# EAGLE board SparkFun_MOSFET_Power_Controller_Panel_v10 (EAGLE 7.5.0)
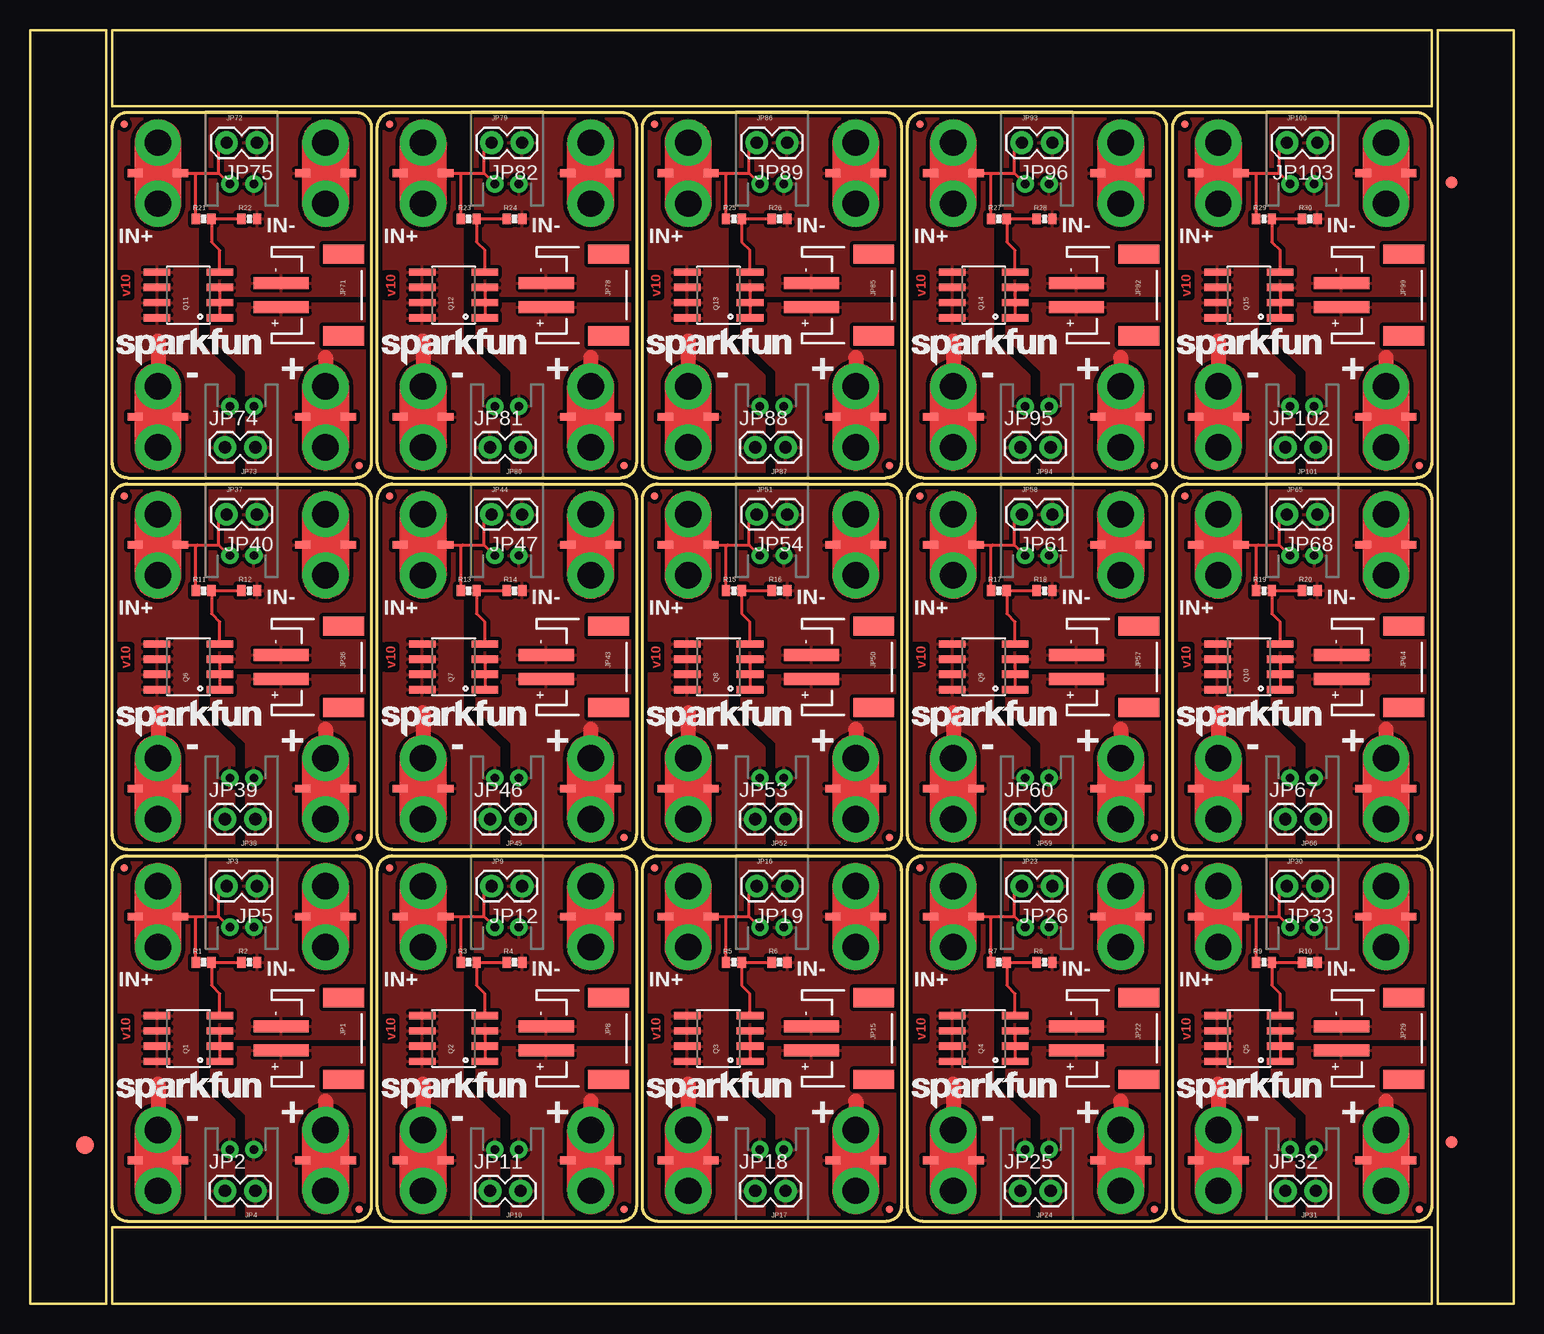
[diagram p0: board, top side]
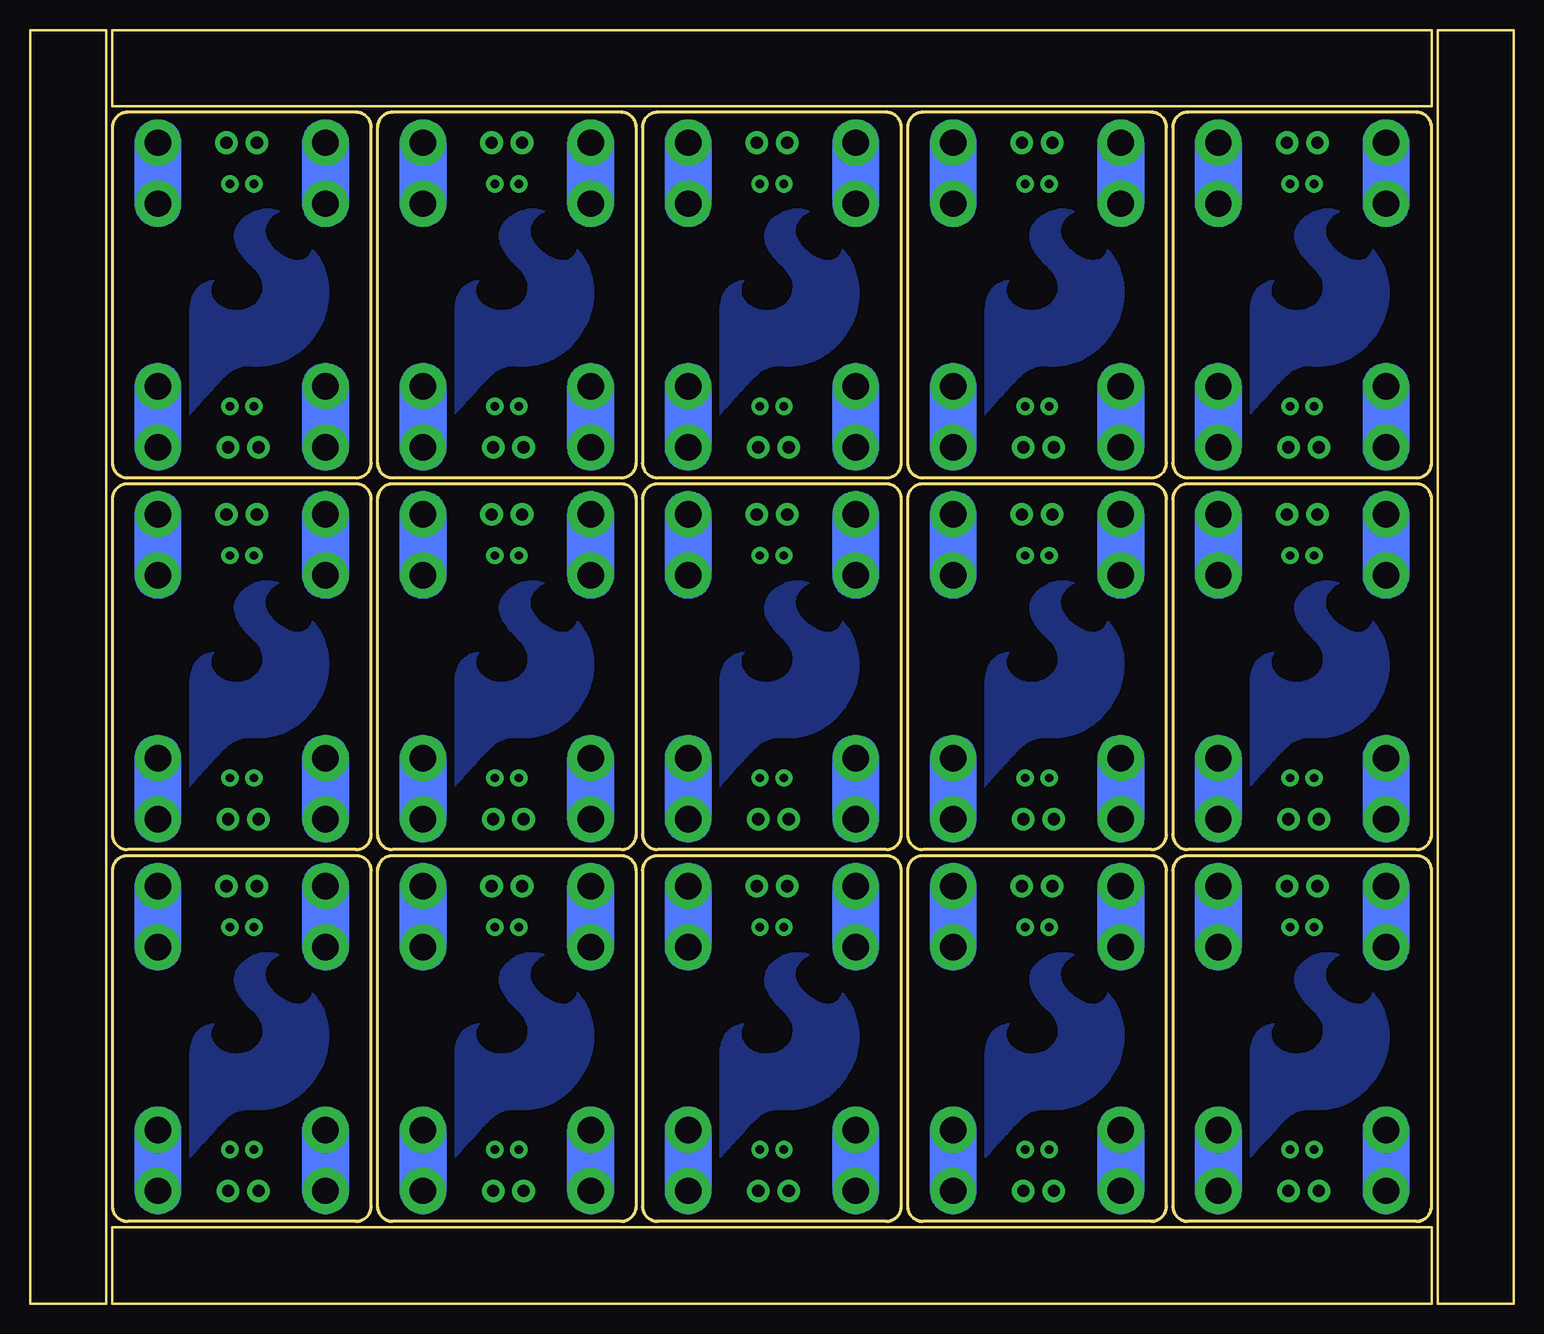
[diagram p1: board, bottom side, seen from below]

Size 123.7 x 106.17 mm. Coordinates in mm from the lower left corner, seen from the top.
Outline: 6.35,79.25 6.35,0 0,0 0,29.72
Outline: 0,27.18 0,106.17 6.35,106.17 6.35,76.71
Outline: 79.25,0 6.86,0 6.86,6.35 29.72,6.35
Outline: 27.18,6.35 116.84,6.35 116.84,0 76.71,0
Outline: 123.7,79.25 123.7,0 117.35,0 117.35,29.72
Outline: 117.35,27.18 117.35,106.17 123.7,106.17 123.7,76.71
Outline: 44.45,106.17 116.84,106.17 116.84,99.82 93.98,99.82
Outline: 96.52,99.82 6.86,99.82 6.86,106.17 46.99,106.17
Outline: 8.13,6.86 27.18,6.86 arc90 28.45,8.13 28.45,36.07 arc90 27.18,37.34 8.13,37.34 arc90 6.86,36.07 6.86,8.13 arc90 8.13,6.86
Outline: 30.23,6.86 49.28,6.86 arc90 50.55,8.13 50.55,36.07 arc90 49.28,37.34 30.23,37.34 arc90 28.96,36.07 28.96,8.13 arc90 30.23,6.86
Outline: 52.32,6.86 71.37,6.86 arc90 72.64,8.13 72.64,36.07 arc90 71.37,37.34 52.32,37.34 arc90 51.05,36.07 51.05,8.13 arc90 52.32,6.86
Outline: 74.42,6.86 93.47,6.86 arc90 94.74,8.13 94.74,36.07 arc90 93.47,37.34 74.42,37.34 arc90 73.15,36.07 73.15,8.13 arc90 74.42,6.86
Outline: 96.52,6.86 115.57,6.86 arc90 116.84,8.13 116.84,36.07 arc90 115.57,37.34 96.52,37.34 arc90 95.25,36.07 95.25,8.13 arc90 96.52,6.86
Outline: 8.13,37.85 27.18,37.85 arc90 28.45,39.12 28.45,67.06 arc90 27.18,68.33 8.13,68.33 arc90 6.86,67.06 6.86,39.12 arc90 8.13,37.85
Outline: 30.23,37.85 49.28,37.85 arc90 50.55,39.12 50.55,67.06 arc90 49.28,68.33 30.23,68.33 arc90 28.96,67.06 28.96,39.12 arc90 30.23,37.85
Outline: 52.32,37.85 71.37,37.85 arc90 72.64,39.12 72.64,67.06 arc90 71.37,68.33 52.32,68.33 arc90 51.05,67.06 51.05,39.12 arc90 52.32,37.85
Outline: 74.42,37.85 93.47,37.85 arc90 94.74,39.12 94.74,67.06 arc90 93.47,68.33 74.42,68.33 arc90 73.15,67.06 73.15,39.12 arc90 74.42,37.85
Outline: 96.52,37.85 115.57,37.85 arc90 116.84,39.12 116.84,67.06 arc90 115.57,68.33 96.52,68.33 arc90 95.25,67.06 95.25,39.12 arc90 96.52,37.85
Outline: 8.13,68.83 27.18,68.83 arc90 28.45,70.1 28.45,98.04 arc90 27.18,99.31 8.13,99.31 arc90 6.86,98.04 6.86,70.1 arc90 8.13,68.83
Outline: 30.23,68.83 49.28,68.83 arc90 50.55,70.1 50.55,98.04 arc90 49.28,99.31 30.23,99.31 arc90 28.96,98.04 28.96,70.1 arc90 30.23,68.83
Outline: 52.32,68.83 71.37,68.83 arc90 72.64,70.1 72.64,98.04 arc90 71.37,99.31 52.32,99.31 arc90 51.05,98.04 51.05,70.1 arc90 52.32,68.83
Outline: 74.42,68.83 93.47,68.83 arc90 94.74,70.1 94.74,98.04 arc90 93.47,99.31 74.42,99.31 arc90 73.15,98.04 73.15,70.1 arc90 74.42,68.83
Outline: 96.52,68.83 115.57,68.83 arc90 116.84,70.1 116.84,98.04 arc90 115.57,99.31 96.52,99.31 arc90 95.25,98.04 95.25,70.1 arc90 96.52,68.83
Copper layers (1*16): Top 0.035mm / dielectric 1.5mm / Bottom 0.035mm
Design rules "default": minimum track width 8mil, minimum drill 20mil, track to track 8mil, track to pad 8mil, pad to pad 8mil, via to via 8mil, smd to smd 8mil, copper to edge 8mil, drill to drill 8mil, minimum pad ring 12mil, minimum via ring 10mil, stop-mask expansion 4mil, vias tented up to drill 20mil, thermal gap 10mil
bRestrict: area 6.9,6.7 to 23.4,37.2; area 11.9,6.7 to 28.4,37.2; area 29,6.7 to 45.5,37.2; area 34,6.7 to 50.5,37.2; area 51.1,6.7 to 67.6,37.2; area 56.1,6.7 to 72.6,37.2; area 73.2,6.7 to 89.7,37.2; area 78.2,6.7 to 94.7,37.2; area 95.2,6.7 to 111.8,37.2; area 100.3,6.7 to 116.8,37.2; area 6.9,37.7 to 23.4,68.2; area 11.9,37.7 to 28.4,68.2; area 29,37.7 to 45.5,68.2; area 34,37.7 to 50.5,68.2; area 51.1,37.7 to 67.6,68.2; area 56.1,37.7 to 72.6,68.2; area 73.2,37.7 to 89.7,68.2; area 78.2,37.7 to 94.7,68.2; area 95.2,37.7 to 111.8,68.2; area 100.3,37.7 to 116.8,68.2; area 6.9,68.7 to 23.4,99.2; area 11.9,68.7 to 28.4,99.2; area 29,68.7 to 45.5,99.2; area 34,68.7 to 50.5,99.2; area 51.1,68.7 to 67.6,99.2; area 56.1,68.7 to 72.6,99.2; area 73.2,68.7 to 89.7,99.2; area 78.2,68.7 to 94.7,99.2; area 95.2,68.7 to 111.8,99.2; area 100.3,68.7 to 116.8,99.2

## Footprints (pad centres in the part's own frame; a part is rotated, then mirrored left to right if it is on the bottom)
BUTTONHOLE = drill 2.2 pad 3.81: 1 0,0; P$2 5.08,0 | smd 0.635 x 1.27: P$1 2.54,1.905; P$3 2.54,-1.905
FIDUCIAL-1.5X3 = smd 1.5 x 1.5: 1 0,0
FIDUCIAL-1X2 = smd 1 x 1: 1 0,0
JST-2-SMD = smd 1 x 4.6: 1 -1,-3.7; 2 1,-3.7 | smd 1.6 x 3.4: NC1 -3.4,1.5; NC2 3.4,1.5
1X02 = drill 1.016 pad 1.88: 1 0,0; 2 2.54,0
JST-2-PTH-NS = drill 0.7 pad 1.448: 1 -1,0; 2 1,0
MICRO-FIDUCIAL = smd 0.635 x 0.635: 1 0,0
SO08 = smd 0.61 x 2.21: 1 -1.905,-2.616; 2 -0.635,-2.616; 3 0.635,-2.616; 4 1.905,-2.616; 5 1.905,2.616; 6 0.635,2.616; 7 -0.635,2.616; 8 -1.905,2.616
0402-RES = smd 0.7 x 0.9: 1 -0.65,0; 2 0.65,0

## Placement (x,y rotation side)
BH1  TRIG+  [BUTTONHOLE]  10.67,34.8 270 top
BH2  TRIG-  [BUTTONHOLE]  24.64,29.72 90 top
BH3  OUT+  [BUTTONHOLE]  24.64,9.4 90 top
BH4  OUT-  [BUTTONHOLE]  10.67,14.48 270 top
BH5  TRIG+  [BUTTONHOLE]  32.77,34.8 270 top
BH6  TRIG-  [BUTTONHOLE]  46.74,29.72 90 top
BH7  OUT+  [BUTTONHOLE]  46.74,9.4 90 top
BH8  OUT-  [BUTTONHOLE]  32.77,14.48 270 top
BH9  TRIG+  [BUTTONHOLE]  54.86,34.8 270 top
BH10  TRIG-  [BUTTONHOLE]  68.83,29.72 90 top
BH11  OUT+  [BUTTONHOLE]  68.83,9.4 90 top
BH12  OUT-  [BUTTONHOLE]  54.86,14.48 270 top
BH13  TRIG+  [BUTTONHOLE]  76.96,34.8 270 top
BH14  TRIG-  [BUTTONHOLE]  90.93,29.72 90 top
BH15  OUT+  [BUTTONHOLE]  90.93,9.4 90 top
BH16  OUT-  [BUTTONHOLE]  76.96,14.48 270 top
BH17  TRIG+  [BUTTONHOLE]  99.06,34.8 270 top
BH18  TRIG-  [BUTTONHOLE]  113.03,29.72 90 top
BH19  OUT+  [BUTTONHOLE]  113.03,9.4 90 top
BH20  OUT-  [BUTTONHOLE]  99.06,14.48 270 top
BH21  TRIG+  [BUTTONHOLE]  10.67,65.79 270 top
BH22  TRIG-  [BUTTONHOLE]  24.64,60.71 90 top
BH23  OUT+  [BUTTONHOLE]  24.64,40.39 90 top
BH24  OUT-  [BUTTONHOLE]  10.67,45.47 270 top
BH25  TRIG+  [BUTTONHOLE]  32.77,65.79 270 top
BH26  TRIG-  [BUTTONHOLE]  46.74,60.71 90 top
BH27  OUT+  [BUTTONHOLE]  46.74,40.39 90 top
BH28  OUT-  [BUTTONHOLE]  32.77,45.47 270 top
BH29  TRIG+  [BUTTONHOLE]  54.86,65.79 270 top
BH30  TRIG-  [BUTTONHOLE]  68.83,60.71 90 top
BH31  OUT+  [BUTTONHOLE]  68.83,40.39 90 top
BH32  OUT-  [BUTTONHOLE]  54.86,45.47 270 top
BH33  TRIG+  [BUTTONHOLE]  76.96,65.79 270 top
BH34  TRIG-  [BUTTONHOLE]  90.93,60.71 90 top
BH35  OUT+  [BUTTONHOLE]  90.93,40.39 90 top
BH36  OUT-  [BUTTONHOLE]  76.96,45.47 270 top
BH37  TRIG+  [BUTTONHOLE]  99.06,65.79 270 top
BH38  TRIG-  [BUTTONHOLE]  113.03,60.71 90 top
BH39  OUT+  [BUTTONHOLE]  113.03,40.39 90 top
BH40  OUT-  [BUTTONHOLE]  99.06,45.47 270 top
BH41  TRIG+  [BUTTONHOLE]  10.67,96.77 270 top
BH42  TRIG-  [BUTTONHOLE]  24.64,91.69 90 top
BH43  OUT+  [BUTTONHOLE]  24.64,71.37 90 top
BH44  OUT-  [BUTTONHOLE]  10.67,76.45 270 top
BH45  TRIG+  [BUTTONHOLE]  32.77,96.77 270 top
BH46  TRIG-  [BUTTONHOLE]  46.74,91.69 90 top
BH47  OUT+  [BUTTONHOLE]  46.74,71.37 90 top
BH48  OUT-  [BUTTONHOLE]  32.77,76.45 270 top
BH49  TRIG+  [BUTTONHOLE]  54.86,96.77 270 top
BH50  TRIG-  [BUTTONHOLE]  68.83,91.69 90 top
BH51  OUT+  [BUTTONHOLE]  68.83,71.37 90 top
BH52  OUT-  [BUTTONHOLE]  54.86,76.45 270 top
BH53  TRIG+  [BUTTONHOLE]  76.96,96.77 270 top
BH54  TRIG-  [BUTTONHOLE]  90.93,91.69 90 top
BH55  OUT+  [BUTTONHOLE]  90.93,71.37 90 top
BH56  OUT-  [BUTTONHOLE]  76.96,76.45 270 top
BH57  TRIG+  [BUTTONHOLE]  99.06,96.77 270 top
BH58  TRIG-  [BUTTONHOLE]  113.03,91.69 90 top
BH59  OUT+  [BUTTONHOLE]  113.03,71.37 90 top
BH60  OUT-  [BUTTONHOLE]  99.06,76.45 270 top
E$1  [FIDUCIAL-1.5X3]  4.57,13.21 0 top
E$5  [FIDUCIAL-1X2]  118.49,13.46 0 top
E$6  [FIDUCIAL-1X2]  118.49,93.47 180 top
JP1  JST-SMT  [JST-2-SMD]  24.64,22.1 270 top
JP2  [1X02]  16.26,9.4 0 top
JP3  JST-PTH  [JST-2-PTH-NS]  17.65,31.37 0 top
JP4  JST-PTH  [JST-2-PTH-NS]  17.65,12.83 180 top
JP5  [1X02]  18.92,34.8 180 top
JP6  FIDUCIALUFIDUCIAL  [MICRO-FIDUCIAL]  27.43,7.87 0 top
JP7  FIDUCIALUFIDUCIAL  [MICRO-FIDUCIAL]  7.87,36.32 0 top
JP8  JST-SMT  [JST-2-SMD]  46.74,22.1 270 top
JP9  JST-PTH  [JST-2-PTH-NS]  39.75,31.37 0 top
JP10  JST-PTH  [JST-2-PTH-NS]  39.75,12.83 180 top
JP11  [1X02]  38.35,9.4 0 top
JP12  [1X02]  41.02,34.8 180 top
JP13  FIDUCIALUFIDUCIAL  [MICRO-FIDUCIAL]  49.53,7.87 0 top
JP14  FIDUCIALUFIDUCIAL  [MICRO-FIDUCIAL]  29.97,36.32 0 top
JP15  JST-SMT  [JST-2-SMD]  68.83,22.1 270 top
JP16  JST-PTH  [JST-2-PTH-NS]  61.85,31.37 0 top
JP17  JST-PTH  [JST-2-PTH-NS]  61.85,12.83 180 top
JP18  [1X02]  60.45,9.4 0 top
JP19  [1X02]  63.12,34.8 180 top
JP20  FIDUCIALUFIDUCIAL  [MICRO-FIDUCIAL]  71.63,7.87 0 top
JP21  FIDUCIALUFIDUCIAL  [MICRO-FIDUCIAL]  52.07,36.32 0 top
JP22  JST-SMT  [JST-2-SMD]  90.93,22.1 270 top
JP23  JST-PTH  [JST-2-PTH-NS]  83.95,31.37 0 top
JP24  JST-PTH  [JST-2-PTH-NS]  83.95,12.83 180 top
JP25  [1X02]  82.55,9.4 0 top
JP26  [1X02]  85.22,34.8 180 top
JP27  FIDUCIALUFIDUCIAL  [MICRO-FIDUCIAL]  93.73,7.87 0 top
JP28  FIDUCIALUFIDUCIAL  [MICRO-FIDUCIAL]  74.17,36.32 0 top
JP29  JST-SMT  [JST-2-SMD]  113.03,22.1 270 top
JP30  JST-PTH  [JST-2-PTH-NS]  106.05,31.37 0 top
JP31  JST-PTH  [JST-2-PTH-NS]  106.05,12.83 180 top
JP32  [1X02]  104.65,9.4 0 top
JP33  [1X02]  107.31,34.8 180 top
JP34  FIDUCIALUFIDUCIAL  [MICRO-FIDUCIAL]  115.82,7.87 0 top
JP35  FIDUCIALUFIDUCIAL  [MICRO-FIDUCIAL]  96.27,36.32 0 top
JP36  JST-SMT  [JST-2-SMD]  24.64,53.09 270 top
JP37  JST-PTH  [JST-2-PTH-NS]  17.65,62.36 0 top
JP38  JST-PTH  [JST-2-PTH-NS]  17.65,43.81 180 top
JP39  [1X02]  16.26,40.39 0 top
JP40  [1X02]  18.92,65.79 180 top
JP41  FIDUCIALUFIDUCIAL  [MICRO-FIDUCIAL]  27.43,38.86 0 top
JP42  FIDUCIALUFIDUCIAL  [MICRO-FIDUCIAL]  7.87,67.31 0 top
JP43  JST-SMT  [JST-2-SMD]  46.74,53.09 270 top
JP44  JST-PTH  [JST-2-PTH-NS]  39.75,62.36 0 top
JP45  JST-PTH  [JST-2-PTH-NS]  39.75,43.81 180 top
JP46  [1X02]  38.35,40.39 0 top
JP47  [1X02]  41.02,65.79 180 top
JP48  FIDUCIALUFIDUCIAL  [MICRO-FIDUCIAL]  49.53,38.86 0 top
JP49  FIDUCIALUFIDUCIAL  [MICRO-FIDUCIAL]  29.97,67.31 0 top
JP50  JST-SMT  [JST-2-SMD]  68.83,53.09 270 top
JP51  JST-PTH  [JST-2-PTH-NS]  61.85,62.36 0 top
JP52  JST-PTH  [JST-2-PTH-NS]  61.85,43.81 180 top
JP53  [1X02]  60.45,40.39 0 top
JP54  [1X02]  63.12,65.79 180 top
JP55  FIDUCIALUFIDUCIAL  [MICRO-FIDUCIAL]  71.63,38.86 0 top
JP56  FIDUCIALUFIDUCIAL  [MICRO-FIDUCIAL]  52.07,67.31 0 top
JP57  JST-SMT  [JST-2-SMD]  90.93,53.09 270 top
JP58  JST-PTH  [JST-2-PTH-NS]  83.95,62.36 0 top
JP59  JST-PTH  [JST-2-PTH-NS]  83.95,43.81 180 top
JP60  [1X02]  82.55,40.39 0 top
JP61  [1X02]  85.22,65.79 180 top
JP62  FIDUCIALUFIDUCIAL  [MICRO-FIDUCIAL]  93.73,38.86 0 top
JP63  FIDUCIALUFIDUCIAL  [MICRO-FIDUCIAL]  74.17,67.31 0 top
JP64  JST-SMT  [JST-2-SMD]  113.03,53.09 270 top
JP65  JST-PTH  [JST-2-PTH-NS]  106.05,62.36 0 top
JP66  JST-PTH  [JST-2-PTH-NS]  106.05,43.81 180 top
JP67  [1X02]  104.65,40.39 0 top
JP68  [1X02]  107.31,65.79 180 top
JP69  FIDUCIALUFIDUCIAL  [MICRO-FIDUCIAL]  115.82,38.86 0 top
JP70  FIDUCIALUFIDUCIAL  [MICRO-FIDUCIAL]  96.27,67.31 0 top
JP71  JST-SMT  [JST-2-SMD]  24.64,84.07 270 top
JP72  JST-PTH  [JST-2-PTH-NS]  17.65,93.34 0 top
JP73  JST-PTH  [JST-2-PTH-NS]  17.65,74.8 180 top
JP74  [1X02]  16.26,71.37 0 top
JP75  [1X02]  18.92,96.77 180 top
JP76  FIDUCIALUFIDUCIAL  [MICRO-FIDUCIAL]  27.43,69.85 0 top
JP77  FIDUCIALUFIDUCIAL  [MICRO-FIDUCIAL]  7.87,98.3 0 top
JP78  JST-SMT  [JST-2-SMD]  46.74,84.07 270 top
JP79  JST-PTH  [JST-2-PTH-NS]  39.75,93.34 0 top
JP80  JST-PTH  [JST-2-PTH-NS]  39.75,74.8 180 top
JP81  [1X02]  38.35,71.37 0 top
JP82  [1X02]  41.02,96.77 180 top
JP83  FIDUCIALUFIDUCIAL  [MICRO-FIDUCIAL]  49.53,69.85 0 top
JP84  FIDUCIALUFIDUCIAL  [MICRO-FIDUCIAL]  29.97,98.3 0 top
JP85  JST-SMT  [JST-2-SMD]  68.83,84.07 270 top
JP86  JST-PTH  [JST-2-PTH-NS]  61.85,93.34 0 top
JP87  JST-PTH  [JST-2-PTH-NS]  61.85,74.8 180 top
JP88  [1X02]  60.45,71.37 0 top
JP89  [1X02]  63.12,96.77 180 top
JP90  FIDUCIALUFIDUCIAL  [MICRO-FIDUCIAL]  71.63,69.85 0 top
JP91  FIDUCIALUFIDUCIAL  [MICRO-FIDUCIAL]  52.07,98.3 0 top
JP92  JST-SMT  [JST-2-SMD]  90.93,84.07 270 top
JP93  JST-PTH  [JST-2-PTH-NS]  83.95,93.34 0 top
JP94  JST-PTH  [JST-2-PTH-NS]  83.95,74.8 180 top
JP95  [1X02]  82.55,71.37 0 top
JP96  [1X02]  85.22,96.77 180 top
JP97  FIDUCIALUFIDUCIAL  [MICRO-FIDUCIAL]  93.73,69.85 0 top
JP98  FIDUCIALUFIDUCIAL  [MICRO-FIDUCIAL]  74.17,98.3 0 top
JP99  JST-SMT  [JST-2-SMD]  113.03,84.07 270 top
JP100  JST-PTH  [JST-2-PTH-NS]  106.05,93.34 0 top
JP101  JST-PTH  [JST-2-PTH-NS]  106.05,74.8 180 top
JP102  [1X02]  104.65,71.37 0 top
JP103  [1X02]  107.31,96.77 180 top
JP104  FIDUCIALUFIDUCIAL  [MICRO-FIDUCIAL]  115.82,69.85 0 top
JP105  FIDUCIALUFIDUCIAL  [MICRO-FIDUCIAL]  96.27,98.3 0 top
Q1  FDS6630A  [SO08]  13.21,22.1 90 top
Q2  FDS6630A  [SO08]  35.31,22.1 90 top
Q3  FDS6630A  [SO08]  57.4,22.1 90 top
Q4  FDS6630A  [SO08]  79.5,22.1 90 top
Q5  FDS6630A  [SO08]  101.6,22.1 90 top
Q6  FDS6630A  [SO08]  13.21,53.09 90 top
Q7  FDS6630A  [SO08]  35.31,53.09 90 top
Q8  FDS6630A  [SO08]  57.4,53.09 90 top
Q9  FDS6630A  [SO08]  79.5,53.09 90 top
Q10  FDS6630A  [SO08]  101.6,53.09 90 top
Q11  FDS6630A  [SO08]  13.21,84.07 90 top
Q12  FDS6630A  [SO08]  35.31,84.07 90 top
Q13  FDS6630A  [SO08]  57.4,84.07 90 top
Q14  FDS6630A  [SO08]  79.5,84.07 90 top
Q15  FDS6630A  [SO08]  101.6,84.07 90 top
R1  10k  [0402-RES]  14.48,28.45 0 top
R2  1M  [0402-RES]  18.29,28.45 0 top
R3  10k  [0402-RES]  36.58,28.45 0 top
R4  1M  [0402-RES]  40.39,28.45 0 top
R5  10k  [0402-RES]  58.67,28.45 0 top
R6  1M  [0402-RES]  62.48,28.45 0 top
R7  10k  [0402-RES]  80.77,28.45 0 top
R8  1M  [0402-RES]  84.58,28.45 0 top
R9  10k  [0402-RES]  102.87,28.45 0 top
R10  1M  [0402-RES]  106.68,28.45 0 top
R11  10k  [0402-RES]  14.48,59.44 0 top
R12  1M  [0402-RES]  18.29,59.44 0 top
R13  10k  [0402-RES]  36.58,59.44 0 top
R14  1M  [0402-RES]  40.39,59.44 0 top
R15  10k  [0402-RES]  58.67,59.44 0 top
R16  1M  [0402-RES]  62.48,59.44 0 top
R17  10k  [0402-RES]  80.77,59.44 0 top
R18  1M  [0402-RES]  84.58,59.44 0 top
R19  10k  [0402-RES]  102.87,59.44 0 top
R20  1M  [0402-RES]  106.68,59.44 0 top
R21  10k  [0402-RES]  14.48,90.42 0 top
R22  1M  [0402-RES]  18.29,90.42 0 top
R23  10k  [0402-RES]  36.58,90.42 0 top
R24  1M  [0402-RES]  40.39,90.42 0 top
R25  10k  [0402-RES]  58.67,90.42 0 top
R26  1M  [0402-RES]  62.48,90.42 0 top
R27  10k  [0402-RES]  80.77,90.42 0 top
R28  1M  [0402-RES]  84.58,90.42 0 top
R29  10k  [0402-RES]  102.87,90.42 0 top
R30  1M  [0402-RES]  106.68,90.42 0 top

## Library data of the parts
BH1-BH60 = LilyPad-Wearables; NO_PART: 1
E$1 = SparkFun-Retired
E$5 E$6 = SparkFun-Aesthetics
JP1 JP8 JP15 JP22 JP29 JP36 JP43 JP50 JP57 JP64 JP71 JP78 JP85 JP92 JP99 = SparkFun-Connectors; PROD_ID: CONN-08352
JP2 JP5 JP11 JP12 JP18 JP19 JP25 JP26 JP32 JP33 JP39 JP40 JP46 JP47 JP53 JP54 JP60 JP61 JP67 JP68 JP74 JP75 JP81 JP82 JP88 JP89 JP95 JP96 JP102 JP103 = SparkFun-Connectors
JP3 JP4 JP9 JP10 JP16 JP17 JP23 JP24 JP30 JP31 JP37 JP38 JP44 JP45 JP51 JP52 JP58 JP59 JP65 JP66 JP72 JP73 JP79 JP80 JP86 JP87 JP93 JP94 JP100 JP101 = SparkFun-Connectors; NO_PART: 1
JP6 JP7 JP13 JP14 JP20 JP21 JP27 JP28 JP34 JP35 JP41 JP42 JP48 JP49 JP55 JP56 JP62 JP63 JP69 JP70 JP76 JP77 JP83 JP84 JP90 JP91 JP97 JP98 JP104 JP105 = SparkFun
Q1-Q15 = SparkFun-DiscreteSemi; PROD_ID: IC-08089
R1 R3 R5 R7 R9 R11 R13 R15 R17 R19 R21 R23 R25 R27 R29 = SparkFun-Passives; PROD_ID: RES-00824
R2 R4 R6 R8 R10 R12 R14 R16 R18 R20 R22 R24 R26 R28 R30 = SparkFun-Resistors; PROD_ID: RES-07868

## Nets
GND: BH2.P$1 JP1.1 JP3.2 JP5.1 Q1.1 Q1.2 Q1.3 R2.2
GND1: BH6.P$1 JP8.1 JP9.2 JP12.1 Q2.1 Q2.2 Q2.3 R4.2
GND2: BH10.P$1 JP15.1 JP16.2 JP19.1 Q3.1 Q3.2 Q3.3 R6.2
GND3: BH14.P$1 JP22.1 JP23.2 JP26.1 Q4.1 Q4.2 Q4.3 R8.2
GND4: BH18.P$1 JP29.1 JP30.2 JP33.1 Q5.1 Q5.2 Q5.3 R10.2
GND5: BH22.P$1 JP36.1 JP37.2 JP40.1 Q6.1 Q6.2 Q6.3 R12.2
GND6: BH26.P$1 JP43.1 JP44.2 JP47.1 Q7.1 Q7.2 Q7.3 R14.2
GND7: BH30.P$1 JP50.1 JP51.2 JP54.1 Q8.1 Q8.2 Q8.3 R16.2
GND8: BH34.P$1 JP57.1 JP58.2 JP61.1 Q9.1 Q9.2 Q9.3 R18.2
GND9: BH38.P$1 JP64.1 JP65.2 JP68.1 Q10.1 Q10.2 Q10.3 R20.2
GND10: BH42.P$1 JP71.1 JP72.2 JP75.1 Q11.1 Q11.2 Q11.3 R22.2
GND11: BH46.P$1 JP78.1 JP79.2 JP82.1 Q12.1 Q12.2 Q12.3 R24.2
GND12: BH50.P$1 JP85.1 JP86.2 JP89.1 Q13.1 Q13.2 Q13.3 R26.2
GND13: BH54.P$1 JP92.1 JP93.2 JP96.1 Q14.1 Q14.2 Q14.3 R28.2
GND14: BH58.P$1 JP99.1 JP100.2 JP103.1 Q15.1 Q15.2 Q15.3 R30.2
N$1: Q1.4 R1.2 R2.1
N$3: Q2.4 R3.2 R4.1
N$5: Q3.4 R5.2 R6.1
N$7: Q4.4 R7.2 R8.1
N$9: Q5.4 R9.2 R10.1
N$11: Q6.4 R11.2 R12.1
N$13: Q7.4 R13.2 R14.1
N$15: Q8.4 R15.2 R16.1
N$17: Q9.4 R17.2 R18.1
N$19: Q10.4 R19.2 R20.1
N$21: Q11.4 R21.2 R22.1
N$23: Q12.4 R23.2 R24.1
N$25: Q13.4 R25.2 R26.1
N$27: Q14.4 R27.2 R28.1
N$29: Q15.4 R29.2 R30.1
OUT-: BH4.P$1 JP2.1 JP4.2 Q1.5 Q1.6 Q1.7 Q1.8
OUT-1: BH8.P$1 JP10.2 JP11.1 Q2.5 Q2.6 Q2.7 Q2.8
OUT-2: BH12.P$1 JP17.2 JP18.1 Q3.5 Q3.6 Q3.7 Q3.8
OUT-3: BH16.P$1 JP24.2 JP25.1 Q4.5 Q4.6 Q4.7 Q4.8
OUT-4: BH20.P$1 JP31.2 JP32.1 Q5.5 Q5.6 Q5.7 Q5.8
OUT-5: BH24.P$1 JP38.2 JP39.1 Q6.5 Q6.6 Q6.7 Q6.8
OUT-6: BH28.P$1 JP45.2 JP46.1 Q7.5 Q7.6 Q7.7 Q7.8
OUT-7: BH32.P$1 JP52.2 JP53.1 Q8.5 Q8.6 Q8.7 Q8.8
OUT-8: BH36.P$1 JP59.2 JP60.1 Q9.5 Q9.6 Q9.7 Q9.8
OUT-9: BH40.P$1 JP66.2 JP67.1 Q10.5 Q10.6 Q10.7 Q10.8
OUT-10: BH44.P$1 JP73.2 JP74.1 Q11.5 Q11.6 Q11.7 Q11.8
OUT-11: BH48.P$1 JP80.2 JP81.1 Q12.5 Q12.6 Q12.7 Q12.8
OUT-12: BH52.P$1 JP87.2 JP88.1 Q13.5 Q13.6 Q13.7 Q13.8
OUT-13: BH56.P$1 JP94.2 JP95.1 Q14.5 Q14.6 Q14.7 Q14.8
OUT-14: BH60.P$1 JP101.2 JP102.1 Q15.5 Q15.6 Q15.7 Q15.8
TRIG+: BH1.P$1 JP3.1 JP5.2 R1.1
TRIG+1: BH5.P$1 JP9.1 JP12.2 R3.1
TRIG+2: BH9.P$1 JP16.1 JP19.2 R5.1
TRIG+3: BH13.P$1 JP23.1 JP26.2 R7.1
TRIG+4: BH17.P$1 JP30.1 JP33.2 R9.1
TRIG+5: BH21.P$1 JP37.1 JP40.2 R11.1
TRIG+6: BH25.P$1 JP44.1 JP47.2 R13.1
TRIG+7: BH29.P$1 JP51.1 JP54.2 R15.1
TRIG+8: BH33.P$1 JP58.1 JP61.2 R17.1
TRIG+9: BH37.P$1 JP65.1 JP68.2 R19.1
TRIG+10: BH41.P$1 JP72.1 JP75.2 R21.1
TRIG+11: BH45.P$1 JP79.1 JP82.2 R23.1
TRIG+12: BH49.P$1 JP86.1 JP89.2 R25.1
TRIG+13: BH53.P$1 JP93.1 JP96.2 R27.1
TRIG+14: BH57.P$1 JP100.1 JP103.2 R29.1
V_BATT: BH3.P$1 JP1.2 JP2.2 JP4.1
V_BATT1: BH7.P$1 JP8.2 JP10.1 JP11.2
V_BATT2: BH11.P$1 JP15.2 JP17.1 JP18.2
V_BATT3: BH15.P$1 JP22.2 JP24.1 JP25.2
V_BATT4: BH19.P$1 JP29.2 JP31.1 JP32.2
V_BATT5: BH23.P$1 JP36.2 JP38.1 JP39.2
V_BATT6: BH27.P$1 JP43.2 JP45.1 JP46.2
V_BATT7: BH31.P$1 JP50.2 JP52.1 JP53.2
V_BATT8: BH35.P$1 JP57.2 JP59.1 JP60.2
V_BATT9: BH39.P$1 JP64.2 JP66.1 JP67.2
V_BATT10: BH43.P$1 JP71.2 JP73.1 JP74.2
V_BATT11: BH47.P$1 JP78.2 JP80.1 JP81.2
V_BATT12: BH51.P$1 JP85.2 JP87.1 JP88.2
V_BATT13: BH55.P$1 JP92.2 JP94.1 JP95.2
V_BATT14: BH59.P$1 JP99.2 JP101.1 JP102.2

## Tracks (layer width: path | path; a pad name or v marks a point on that pad's centre or on a via)
GND
  Top 0.254: Q1.3 Q1.2 Q1.1
  pour Top (isolate 0.305): 14.99,37.34 14.99,22.1 28.45,22.1 28.45,37.34
GND1
  Top 0.254: Q2.3 Q2.2 Q2.1
  pour Top (isolate 0.305): 37.08,37.34 37.08,22.1 50.55,22.1 50.55,37.34
GND2
  Top 0.254: Q3.3 Q3.2 Q3.1
  pour Top (isolate 0.305): 59.18,37.34 59.18,22.1 72.64,22.1 72.64,37.34
GND3
  Top 0.254: Q4.3 Q4.2 Q4.1
  pour Top (isolate 0.305): 81.28,37.34 81.28,22.1 94.74,22.1 94.74,37.34
GND4
  Top 0.254: Q5.3 Q5.2 Q5.1
  pour Top (isolate 0.305): 103.38,37.34 103.38,22.1 116.84,22.1 116.84,37.34
GND5
  Top 0.254: Q6.3 Q6.2 Q6.1
  pour Top (isolate 0.305): 14.99,68.33 14.99,53.09 28.45,53.09 28.45,68.33
GND6
  Top 0.254: Q7.3 Q7.2 Q7.1
  pour Top (isolate 0.305): 37.08,68.33 37.08,53.09 50.55,53.09 50.55,68.33
GND7
  Top 0.254: Q8.3 Q8.2 Q8.1
  pour Top (isolate 0.305): 59.18,68.33 59.18,53.09 72.64,53.09 72.64,68.33
GND8
  Top 0.254: Q9.3 Q9.2 Q9.1
  pour Top (isolate 0.305): 81.28,68.33 81.28,53.09 94.74,53.09 94.74,68.33
GND9
  Top 0.254: Q10.3 Q10.2 Q10.1
  pour Top (isolate 0.305): 103.38,68.33 103.38,53.09 116.84,53.09 116.84,68.33
GND10
  Top 0.254: Q11.3 Q11.2 Q11.1
  pour Top (isolate 0.305): 14.99,99.31 14.99,84.07 28.45,84.07 28.45,99.31
GND11
  Top 0.254: Q12.3 Q12.2 Q12.1
  pour Top (isolate 0.305): 37.08,99.31 37.08,84.07 50.55,84.07 50.55,99.31
GND12
  Top 0.254: Q13.3 Q13.2 Q13.1
  pour Top (isolate 0.305): 59.18,99.31 59.18,84.07 72.64,84.07 72.64,99.31
GND13
  Top 0.254: Q14.3 Q14.2 Q14.1
  pour Top (isolate 0.305): 81.28,99.31 81.28,84.07 94.74,84.07 94.74,99.31
GND14
  Top 0.254: Q15.3 Q15.2 Q15.1
  pour Top (isolate 0.305): 103.38,99.31 103.38,84.07 116.84,84.07 116.84,99.31
N$1
  Top 0.254: R2.1 R1.2 15.13,26.53 15.82,25.83 Q1.4
N$2
  pour Bottom (isolate 0.305): 6.86,37.34 28.45,37.34 28.45,6.86 6.86,6.86
N$3
  Top 0.254: R4.1 R3.2 37.23,26.53 37.92,25.83 Q2.4
N$4
  pour Bottom (isolate 0.305): 28.96,37.34 50.55,37.34 50.55,6.86 28.96,6.86
N$5
  Top 0.254: R6.1 R5.2 59.32,26.53 60.02,25.83 Q3.4
N$6
  pour Bottom (isolate 0.305): 51.05,37.34 72.64,37.34 72.64,6.86 51.05,6.86
N$7
  Top 0.254: R8.1 R7.2 81.42,26.53 82.12,25.83 Q4.4
N$8
  pour Bottom (isolate 0.305): 73.15,37.34 94.74,37.34 94.74,6.86 73.15,6.86
N$9
  Top 0.254: R10.1 R9.2 103.52,26.53 104.22,25.83 Q5.4
N$10
  pour Bottom (isolate 0.305): 95.25,37.34 116.84,37.34 116.84,6.86 95.25,6.86
N$11
  Top 0.254: R12.1 R11.2 15.13,57.52 15.82,56.82 Q6.4
N$12
  pour Bottom (isolate 0.305): 6.86,68.33 28.45,68.33 28.45,37.85 6.86,37.85
N$13
  Top 0.254: R14.1 R13.2 37.23,57.52 37.92,56.82 Q7.4
N$14
  pour Bottom (isolate 0.305): 28.96,68.33 50.55,68.33 50.55,37.85 28.96,37.85
N$15
  Top 0.254: R16.1 R15.2 59.32,57.52 60.02,56.82 Q8.4
N$16
  pour Bottom (isolate 0.305): 51.05,68.33 72.64,68.33 72.64,37.85 51.05,37.85
N$17
  Top 0.254: R18.1 R17.2 81.42,57.52 82.12,56.82 Q9.4
N$18
  pour Bottom (isolate 0.305): 73.15,68.33 94.74,68.33 94.74,37.85 73.15,37.85
N$19
  Top 0.254: R20.1 R19.2 103.52,57.52 104.22,56.82 Q10.4
N$20
  pour Bottom (isolate 0.305): 95.25,68.33 116.84,68.33 116.84,37.85 95.25,37.85
N$21
  Top 0.254: R22.1 R21.2 15.13,88.5 15.82,87.81 Q11.4
N$22
  pour Bottom (isolate 0.305): 6.86,99.31 28.45,99.31 28.45,68.83 6.86,68.83
N$23
  Top 0.254: R24.1 R23.2 37.23,88.5 37.92,87.81 Q12.4
N$24
  pour Bottom (isolate 0.305): 28.96,99.31 50.55,99.31 50.55,68.83 28.96,68.83
N$25
  Top 0.254: R26.1 R25.2 59.32,88.5 60.02,87.81 Q13.4
N$26
  pour Bottom (isolate 0.305): 51.05,99.31 72.64,99.31 72.64,68.83 51.05,68.83
N$27
  Top 0.254: R28.1 R27.2 81.42,88.5 82.12,87.81 Q14.4
N$28
  pour Bottom (isolate 0.305): 73.15,99.31 94.74,99.31 94.74,68.83 73.15,68.83
N$29
  Top 0.254: R30.1 R29.2 103.52,88.5 104.22,87.81 Q15.4
N$30
  pour Bottom (isolate 0.305): 95.25,99.31 116.84,99.31 116.84,68.83 95.25,68.83
OUT-
  Top 1.27: 10.67,18.29 10.67,14.48
  pour Top (isolate 0.305): 13.97,18.29 13.97,37.34 6.86,37.34 6.86,6.86 17.02,6.86 17.02,15.37
OUT-1
  Top 1.27: 32.77,18.29 32.77,14.48
  pour Top (isolate 0.305): 36.07,18.29 36.07,37.34 28.96,37.34 28.96,6.86 39.12,6.86 39.12,15.37
OUT-2
  Top 1.27: 54.86,18.29 54.86,14.48
  pour Top (isolate 0.305): 58.17,18.29 58.17,37.34 51.05,37.34 51.05,6.86 61.21,6.86 61.21,15.37
OUT-3
  Top 1.27: 76.96,18.29 76.96,14.48
  pour Top (isolate 0.305): 80.26,18.29 80.26,37.34 73.15,37.34 73.15,6.86 83.31,6.86 83.31,15.37
OUT-4
  Top 1.27: 99.06,18.29 99.06,14.48
  pour Top (isolate 0.305): 102.36,18.29 102.36,37.34 95.25,37.34 95.25,6.86 105.41,6.86 105.41,15.37
OUT-5
  Top 1.27: 10.67,49.28 10.67,45.47
  pour Top (isolate 0.305): 13.97,49.28 13.97,68.33 6.86,68.33 6.86,37.85 17.02,37.85 17.02,46.35
OUT-6
  Top 1.27: 32.77,49.28 32.77,45.47
  pour Top (isolate 0.305): 36.07,49.28 36.07,68.33 28.96,68.33 28.96,37.85 39.12,37.85 39.12,46.35
OUT-7
  Top 1.27: 54.86,49.28 54.86,45.47
  pour Top (isolate 0.305): 58.17,49.28 58.17,68.33 51.05,68.33 51.05,37.85 61.21,37.85 61.21,46.35
OUT-8
  Top 1.27: 76.96,49.28 76.96,45.47
  pour Top (isolate 0.305): 80.26,49.28 80.26,68.33 73.15,68.33 73.15,37.85 83.31,37.85 83.31,46.35
OUT-9
  Top 1.27: 99.06,49.28 99.06,45.47
  pour Top (isolate 0.305): 102.36,49.28 102.36,68.33 95.25,68.33 95.25,37.85 105.41,37.85 105.41,46.35
OUT-10
  Top 1.27: 10.67,80.26 10.67,76.45
  pour Top (isolate 0.305): 13.97,80.26 13.97,99.31 6.86,99.31 6.86,68.83 17.02,68.83 17.02,77.34
OUT-11
  Top 1.27: 32.77,80.26 32.77,76.45
  pour Top (isolate 0.305): 36.07,80.26 36.07,99.31 28.96,99.31 28.96,68.83 39.12,68.83 39.12,77.34
OUT-12
  Top 1.27: 54.86,80.26 54.86,76.45
  pour Top (isolate 0.305): 58.17,80.26 58.17,99.31 51.05,99.31 51.05,68.83 61.21,68.83 61.21,77.34
OUT-13
  Top 1.27: 76.96,80.26 76.96,76.45
  pour Top (isolate 0.305): 80.26,80.26 80.26,99.31 73.15,99.31 73.15,68.83 83.31,68.83 83.31,77.34
OUT-14
  Top 1.27: 99.06,80.26 99.06,76.45
  pour Top (isolate 0.305): 102.36,80.26 102.36,99.31 95.25,99.31 95.25,68.83 105.41,68.83 105.41,77.34
TRIG+
  Top 0.254: 15.75,32.26 JP3.1 | BH1.P$1 13.97,32.26 | 13.97,32.26 15.75,32.26 | R1.1 13.83,32.12 13.97,32.26 | 15.75,32.26 15.75,34.16 JP5.2
TRIG+1
  Top 0.254: 37.85,32.26 JP9.1 | BH5.P$1 36.07,32.26 | 36.07,32.26 37.85,32.26 | R3.1 35.93,32.12 36.07,32.26 | 37.85,32.26 37.85,34.16 JP12.2
TRIG+2
  Top 0.254: 59.94,32.26 JP16.1 | BH9.P$1 58.17,32.26 | 58.17,32.26 59.94,32.26 | R5.1 58.02,32.12 58.17,32.26 | 59.94,32.26 59.94,34.16 JP19.2
TRIG+3
  Top 0.254: 82.04,32.26 JP23.1 | BH13.P$1 80.26,32.26 | 80.26,32.26 82.04,32.26 | R7.1 80.12,32.12 80.26,32.26 | 82.04,32.26 82.04,34.16 JP26.2
TRIG+4
  Top 0.254: 104.14,32.26 JP30.1 | BH17.P$1 102.36,32.26 | 102.36,32.26 104.14,32.26 | R9.1 102.22,32.12 102.36,32.26 | 104.14,32.26 104.14,34.16 JP33.2
TRIG+5
  Top 0.254: 15.75,63.25 JP37.1 | BH21.P$1 13.97,63.25 | 13.97,63.25 15.75,63.25 | R11.1 13.83,63.1 13.97,63.25 | 15.75,63.25 15.75,65.15 JP40.2
TRIG+6
  Top 0.254: 37.85,63.25 JP44.1 | BH25.P$1 36.07,63.25 | 36.07,63.25 37.85,63.25 | R13.1 35.93,63.1 36.07,63.25 | 37.85,63.25 37.85,65.15 JP47.2
TRIG+7
  Top 0.254: 59.94,63.25 JP51.1 | BH29.P$1 58.17,63.25 | 58.17,63.25 59.94,63.25 | R15.1 58.02,63.1 58.17,63.25 | 59.94,63.25 59.94,65.15 JP54.2
TRIG+8
  Top 0.254: 82.04,63.25 JP58.1 | BH33.P$1 80.26,63.25 | 80.26,63.25 82.04,63.25 | R17.1 80.12,63.1 80.26,63.25 | 82.04,63.25 82.04,65.15 JP61.2
TRIG+9
  Top 0.254: 104.14,63.25 JP65.1 | BH37.P$1 102.36,63.25 | 102.36,63.25 104.14,63.25 | R19.1 102.22,63.1 102.36,63.25 | 104.14,63.25 104.14,65.15 JP68.2
TRIG+10
  Top 0.254: 15.75,94.23 JP72.1 | BH41.P$1 13.97,94.23 | 13.97,94.23 15.75,94.23 | R21.1 13.83,94.09 13.97,94.23 | 15.75,94.23 15.75,96.14 JP75.2
TRIG+11
  Top 0.254: 37.85,94.23 JP79.1 | BH45.P$1 36.07,94.23 | 36.07,94.23 37.85,94.23 | R23.1 35.93,94.09 36.07,94.23 | 37.85,94.23 37.85,96.14 JP82.2
TRIG+12
  Top 0.254: 59.94,94.23 JP86.1 | BH49.P$1 58.17,94.23 | 58.17,94.23 59.94,94.23 | R25.1 58.02,94.09 58.17,94.23 | 59.94,94.23 59.94,96.14 JP89.2
TRIG+13
  Top 0.254: 82.04,94.23 JP93.1 | BH53.P$1 80.26,94.23 | 80.26,94.23 82.04,94.23 | R27.1 80.12,94.09 80.26,94.23 | 82.04,94.23 82.04,96.14 JP96.2
TRIG+14
  Top 0.254: 104.14,94.23 JP100.1 | BH57.P$1 102.36,94.23 | 102.36,94.23 104.14,94.23 | R29.1 102.22,94.09 102.36,94.23 | 104.14,94.23 104.14,96.14 JP103.2
V_BATT
  Top 1.27: 24.64,16.89 24.64,14.48
  pour Top (isolate 0.305): 15.11,21.34 15.11,18.54 18.03,15.75 18.03,6.86 28.45,6.86 28.45,21.34
V_BATT1
  Top 1.27: 46.74,16.89 46.74,14.48
  pour Top (isolate 0.305): 37.21,21.34 37.21,18.54 40.13,15.75 40.13,6.86 50.55,6.86 50.55,21.34
V_BATT2
  Top 1.27: 68.83,16.89 68.83,14.48
  pour Top (isolate 0.305): 59.31,21.34 59.31,18.54 62.23,15.75 62.23,6.86 72.64,6.86 72.64,21.34
V_BATT3
  Top 1.27: 90.93,16.89 90.93,14.48
  pour Top (isolate 0.305): 81.41,21.34 81.41,18.54 84.33,15.75 84.33,6.86 94.74,6.86 94.74,21.34
V_BATT4
  Top 1.27: 113.03,16.89 113.03,14.48
  pour Top (isolate 0.305): 103.5,21.34 103.5,18.54 106.43,15.75 106.43,6.86 116.84,6.86 116.84,21.34
V_BATT5
  Top 1.27: 24.64,47.88 24.64,45.47
  pour Top (isolate 0.305): 15.11,52.32 15.11,49.53 18.03,46.74 18.03,37.85 28.45,37.85 28.45,52.32
V_BATT6
  Top 1.27: 46.74,47.88 46.74,45.47
  pour Top (isolate 0.305): 37.21,52.32 37.21,49.53 40.13,46.74 40.13,37.85 50.55,37.85 50.55,52.32
V_BATT7
  Top 1.27: 68.83,47.88 68.83,45.47
  pour Top (isolate 0.305): 59.31,52.32 59.31,49.53 62.23,46.74 62.23,37.85 72.64,37.85 72.64,52.32
V_BATT8
  Top 1.27: 90.93,47.88 90.93,45.47
  pour Top (isolate 0.305): 81.41,52.32 81.41,49.53 84.33,46.74 84.33,37.85 94.74,37.85 94.74,52.32
V_BATT9
  Top 1.27: 113.03,47.88 113.03,45.47
  pour Top (isolate 0.305): 103.5,52.32 103.5,49.53 106.43,46.74 106.43,37.85 116.84,37.85 116.84,52.32
V_BATT10
  Top 1.27: 24.64,78.87 24.64,76.45
  pour Top (isolate 0.305): 15.11,83.31 15.11,80.52 18.03,77.72 18.03,68.83 28.45,68.83 28.45,83.31
V_BATT11
  Top 1.27: 46.74,78.87 46.74,76.45
  pour Top (isolate 0.305): 37.21,83.31 37.21,80.52 40.13,77.72 40.13,68.83 50.55,68.83 50.55,83.31
V_BATT12
  Top 1.27: 68.83,78.87 68.83,76.45
  pour Top (isolate 0.305): 59.31,83.31 59.31,80.52 62.23,77.72 62.23,68.83 72.64,68.83 72.64,83.31
V_BATT13
  Top 1.27: 90.93,78.87 90.93,76.45
  pour Top (isolate 0.305): 81.41,83.31 81.41,80.52 84.33,77.72 84.33,68.83 94.74,68.83 94.74,83.31
V_BATT14
  Top 1.27: 113.03,78.87 113.03,76.45
  pour Top (isolate 0.305): 103.5,83.31 103.5,80.52 106.43,77.72 106.43,68.83 116.84,68.83 116.84,83.31

## Text on the board
Top: v10 | v10 | v10 | v10 | v10 | v10 | v10 | v10 | v10 | v10 | v10 | v10 | v10 | v10 | v10
tPlace: IN- | IN- | IN- | IN- | IN- | IN+ | IN+ | IN+ | IN+ | IN+ | - | - | - | - | - | + | + | + | + | + | + | + | + | + | + | - | - | - | - | - | IN- | IN- | IN- | IN- | IN- | IN+ | IN+ | IN+ | IN+ | IN+ | - | - | - | - | - | + | + | + | + | + | + | + | + | + | + | - | - | - | - | - | IN- | IN- | IN- | IN- | IN- | IN+ | IN+ | IN+ | IN+ | IN+ | - | - | - | - | - | + | + | + | + | + | + | + | + | + | + | - | - | - | - | -